# EAGLE board Flodar_Board_V1-1 (EAGLE 9.6.2)
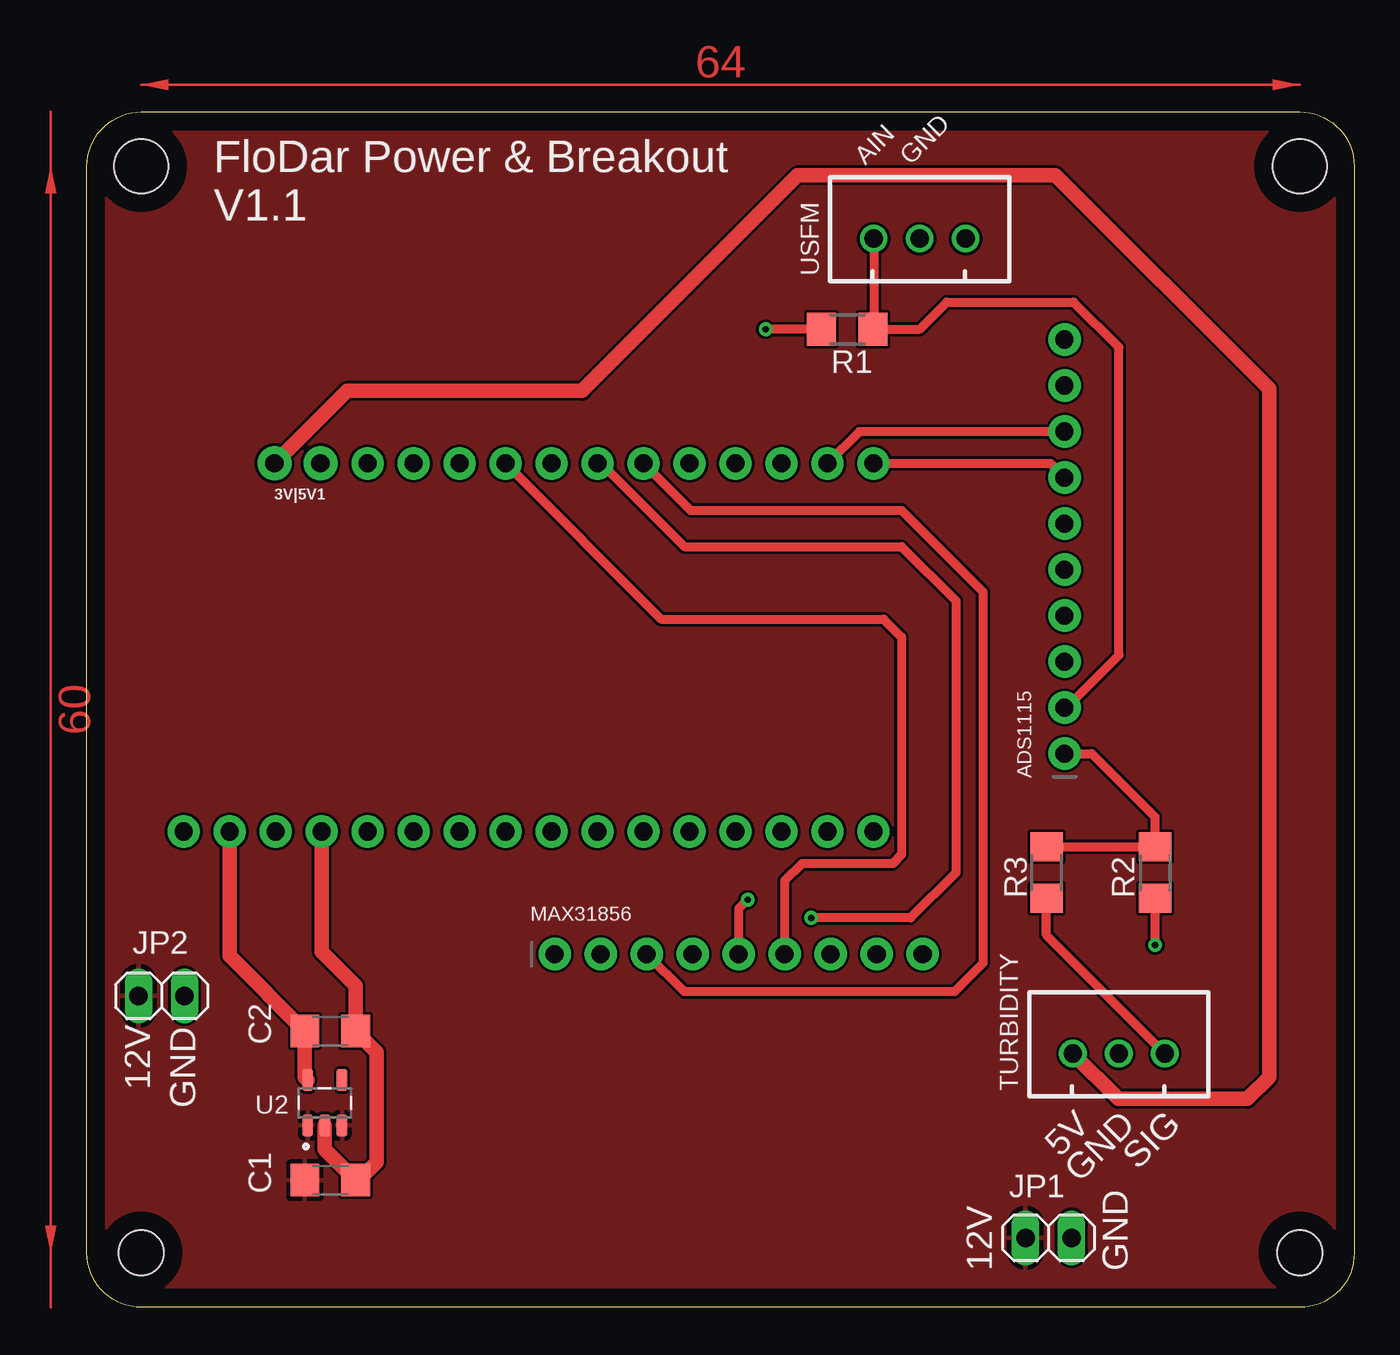
[diagram p0: board, top side]
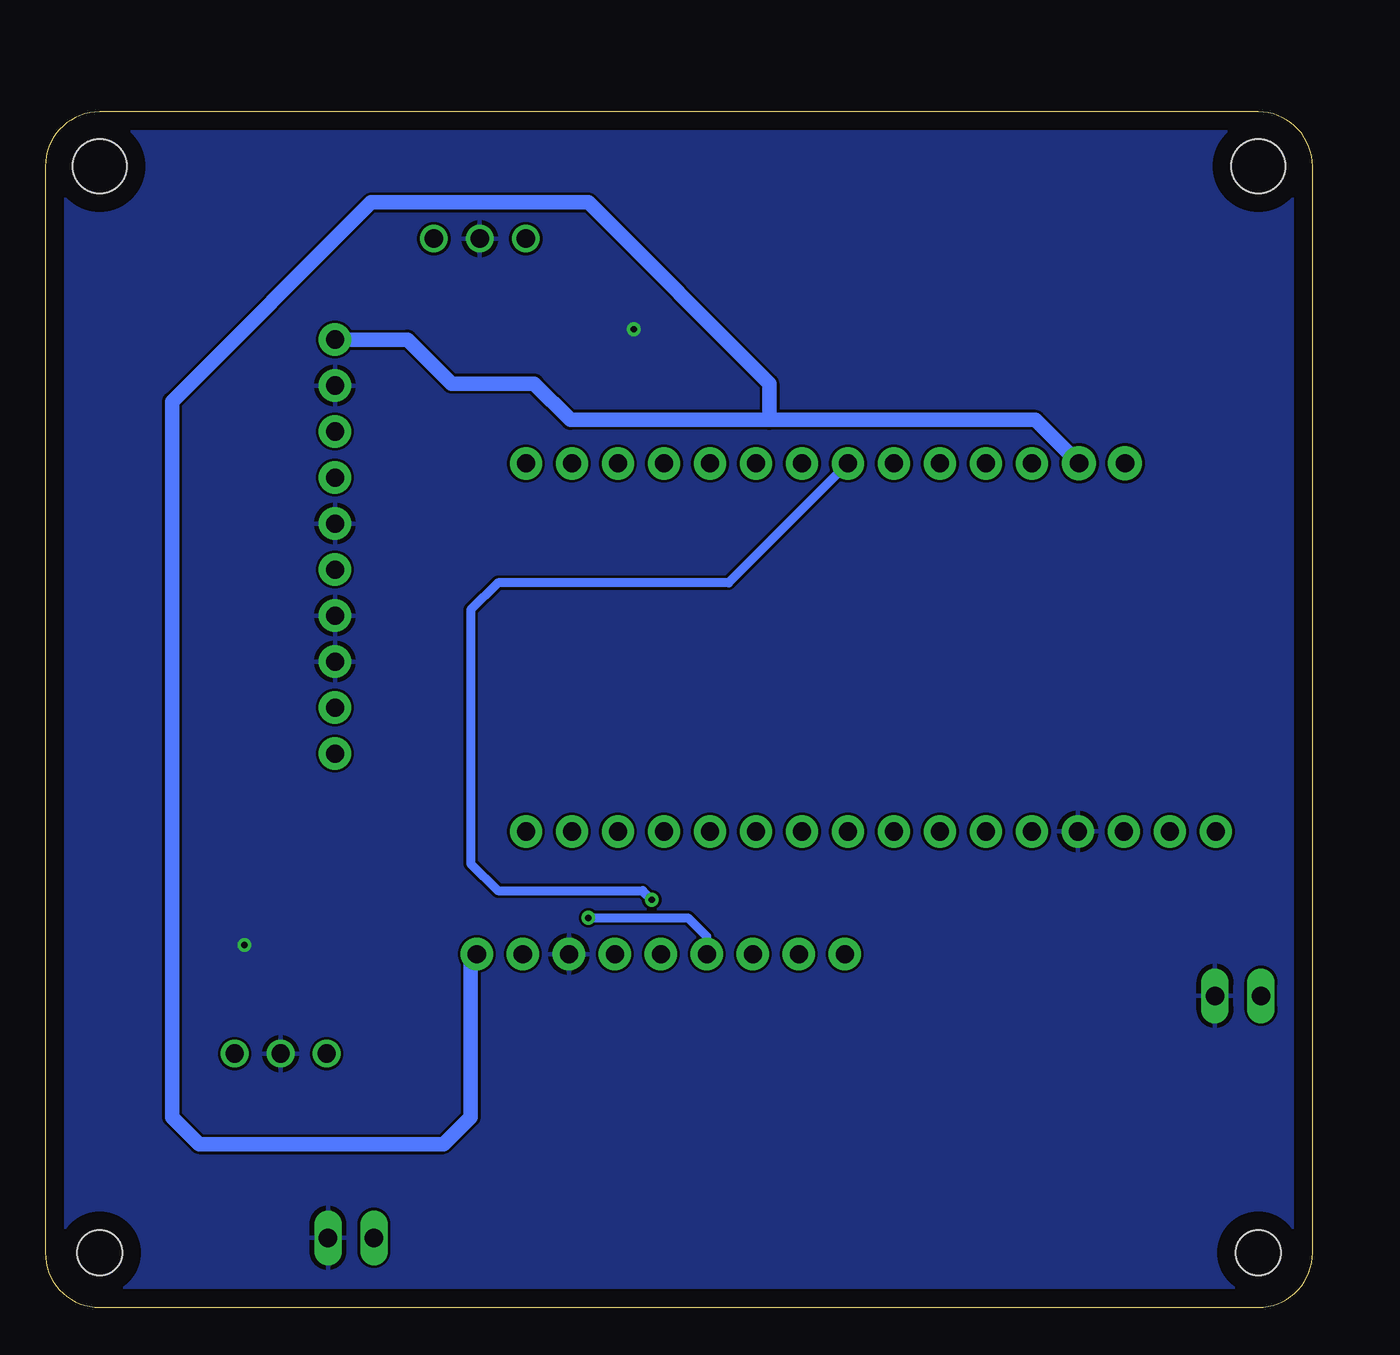
[diagram p1: board, bottom side, seen from below]

Size 70 x 66 mm. Coordinates in mm from the lower left corner, seen from the top.
Outline: 0,63 arc-90 3,66 67,66 arc-90 70,63 70,3 arc-90 67,0 3,0 arc-90 0,3 0,63
Copper layers (1*16): Top 0.035mm / dielectric 1.5mm / Bottom 0.035mm
Design rules "default": minimum track width 6mil, minimum drill 0.35mm, track to track 6mil, track to pad 6mil, pad to pad 6mil, via to via 6mil, smd to smd 6mil, copper to edge 40mil, drill to drill 6mil, minimum pad ring 10mil, minimum via ring 8mil, stop-mask expansion 4mil, vias tented up to drill 0mil, thermal gap 10mil
Holes 2.5 mm at 67,3 3,3
Holes 3 mm at 67,63 3,63

## Footprints (pad centres in the part's own frame; a part is rotated, then mirrored left to right if it is on the bottom)
1X02_NO_SILK = drill 1.016 pad 1.88: 1 0,0; 2 2.54,0
1X10_ROUND70 = drill 1 pad 1.778: 1 -11.43,0; 2 -8.89,0; 3 -6.35,0; 4 -3.81,0; 5 -1.27,0; 6 1.27,0; 7 3.81,0; 8 6.35,0; 9 8.89,0; 10 11.43,0
C1206 = smd 1.6 x 1.8: 1 -1.4,0; 2 1.4,0
1X02 = drill 1.016 long: 1 -1.27,0; 2 1.27,0
1X09_ROUND_70 = drill 1 pad 1.778: 1 -10.16,0; 2 -7.62,0; 3 -5.08,0; 4 -2.54,0; 5 0,0; 6 2.54,0; 7 5.08,0; 8 7.62,0; 9 10.16,0
FEATHERWING = drill 1 pad 1.778: 1 6.35,1.27; 2 8.89,1.27; 3 11.43,1.27; 4 13.97,1.27; 5 16.51,1.27; 6 19.05,1.27; 7 21.59,1.27; 8 24.13,1.27; 9 26.67,1.27; 10 29.21,1.27; 11 31.75,1.27; 12 34.29,1.27; 13 36.83,1.27; 14 39.37,1.27; 15 41.91,1.27; 16 44.45,1.27; 17 44.45,21.59; 18 41.91,21.59; 19 39.37,21.59; 20 36.83,21.59; 21 34.29,21.59; 22 31.75,21.59; 23 29.21,21.59; 24 26.67,21.59; 25 24.13,21.59; 26 21.59,21.59; 27 19.05,21.59; 28 16.51,21.59
R1206 = smd 1.6 x 1.803: 1 -1.422,0; 2 1.422,0
JST-XH-03-PACKAGE-ROUND-PAD = drill 1.016: 1 -2.54,0; 2 0,0; 3 2.54,0
SOT95P280X145-5N = smd 1.21 x 0.59: 1 -1.255,0.95; 2 -1.255,0; 3 -1.255,-0.95; 4 1.255,-0.95; 5 1.255,0.95

## Placement (x,y rotation side)
3V|5V1  [1X02_NO_SILK]  12.9,46.6 180 top
ADS1115  [1X10_ROUND70]  54,42 90 top
C1  1uF  [C1206]  13.44,7.02 0 top
C2  3.3uF  [C1206]  13.44,15.25 0 top
JP1  [1X02]  53.11,3.83 0 top
JP2  [1X02]  4.12,17.19 0 top
MAX31856  [1X09_ROUND_70]  36,19.5 0 top
MS3  FEATHERWING  [FEATHERWING]  -1,25 0 top
R1  150  [R1206]  42,54 180 top
R2  2.2k  [R1206]  59,24 90 top
R3  3.3k  [R1206]  53,24 270 top
TURBIDITY  JST-XH-03-PIN-ROUND-PAD  [JST-XH-03-PACKAGE-ROUND-PAD]  57,14 0 top
U2  LP2981-33DBVR  [SOT95P280X145-5N]  13.14,11.29 90 top
USFM  JST-XH-03-PIN-ROUND-PAD  [JST-XH-03-PACKAGE-ROUND-PAD]  46,59 0 top

## Library data of the parts
3V|5V1 = SparkFun-Connectors
ADS1115 MAX31856 = microbuilder
C1 C2 = rcl; SPICEPREFIX: C
JP1 JP2 = pinhead
MS3 = adafruit_wing
R1-R3 = adafruit
TURBIDITY USFM = Rembrandt Electronics - JST XH Connectors v1-0
U2 = LP2981-33DBVR; AVAILABILITY: In Stock; DESCRIPTION: 100-mA, 16-V, low-dropout voltage regulator with enable 5-SOT-23 -40 to 125; MF: Texas Instruments; MP: LP2981-50DBVR; PACKAGE: SOT-23-5 Texas Instruments; PRICE: None; PURCHASE-URL: https://pricing.snapeda.com/search/part/LP2981-50DBVR/?ref=eda

## Nets
3.3V: C2.1 MS3.2 U2.5
12V: C1.1 JP1.1 JP2.1 U2.1 U2.3
!CS: MAX31856.3 MS3.22
!FAULT: MAX31856.2
AIN2: ADS1115.2 R1.1 USFM.1
AIN3: ADS1115.1 R2.2 R3.1
ALERT: ADS1115.5
DRDY: MAX31856.1
GND: ADS1115.3 ADS1115.4 ADS1115.6 ADS1115.9 C1.2 C2.2 JP1.2 JP2.2 MAX31856.7 MS3.4 R1.2 R2.1 TURBIDITY.2 U2.2 USFM.2
H_3V: 3V|5V1.1 ADS1115.10 MAX31856.9
H_5V: 3V|5V1.2 TURBIDITY.1
SCK: MAX31856.6 MS3.25
SCL: ADS1115.8 MS3.18
SD0: MAX31856.5 MS3.24
SDA: ADS1115.7 MS3.17
SDI: MAX31856.4 MS3.23
SIGNAL: R3.2 TURBIDITY.3

## Tracks (layer width: path | path; a pad name or v marks a point on that pad's centre or on a via)
3.3V
  Top 0.813: U2.5 12.04,12.7 C2.1 7.89,19.4 MS3.2
12V
  pour Top: 0,66 0,0 70,0 70,66
!CS
  Top 0.508: MS3.22 33.34,44 45,44 49.5,39.5 49.5,19 47.92,17.42 33,17.42 MAX31856.3
AIN2
  Top 0.508: ADS1115.2 54.11,33.11 57,36 57,53 54.5,55.5 47.5,55.5 46,54 R1.1 | USFM.1 43.46,54.04
  Top 0.813: 43.46,54.04 R1.1
AIN3
  Top 0.508: ADS1115.1 55.5,30.57 59,27.07 R2.2 R3.1
GND  (via drill 0.35)
  Top 0.508: R2.1 v59,20 | R1.2 v37.5,54
  Top 0.813: U2.2 13.14,8.72 C1.2 15.02,7.02 16,8 16,14.09 C2.2 14.84,17.75 12.97,19.62 MS3.4
  pour Bottom: 0,66 0,0 70,0 70,66
H_3V
  Bottom 0.813: MAX31856.9 46.5,19.16 46.5,10.5 48,9 61.5,9 63,10.5 63,50 52,61 40,61 30,51 30,49 | 30,49 15.3,49 3V|5V1.1 | 30,49 41,49 43,51 47.57,51 50,53.43 ADS1115.10
H_5V
  Top 0.813: TURBIDITY.1 56.96,11.5 64.1,11.5 65.3,12.7 65.3,50.7 53.5,62.5 39.26,62.5 27.36,50.6 14.36,50.6 3V|5V1.2
SCK
  Top 0.508: MS3.25 31.72,38 44,38 45,37 45,25 44.5,24.5 39.5,24.5 38.54,23.54 MAX31856.6
SCL
  Top 0.508: ADS1115.8 42.67,48.35 MS3.18
SD0  (via drill 0.35)
  Top 0.508: v36.5,22.5 36,22 MAX31856.5
  Bottom 0.508: v36.5,22.5 37,23 45,23 46.5,24.5 46.5,38.5 45,40 32.26,40 MS3.24
SDA
  Top 0.508: MS3.17 53.22,46.59 ADS1115.7
SDI  (via drill 0.35)
  Top 0.508: MS3.23 28.41,46.59 33,42 45,42 48,39 48,24 45.5,21.5 v40,21.5
  Bottom 0.508: v40,21.5 34.5,21.5 33.46,20.46 MAX31856.4
SIGNAL
  Top 0.508: TURBIDITY.3 53,20.54 R3.2
(copper drawn outside any net)
  shapes: Top area x4

## Text on the board
tPlace: AIN | GND | 12V | GND | 5V | GND | SIG | 12V | GND
tNames: FloDar Power & Breakout / V1.1